# EAGLE board _X4 (EAGLE 6.6.0)
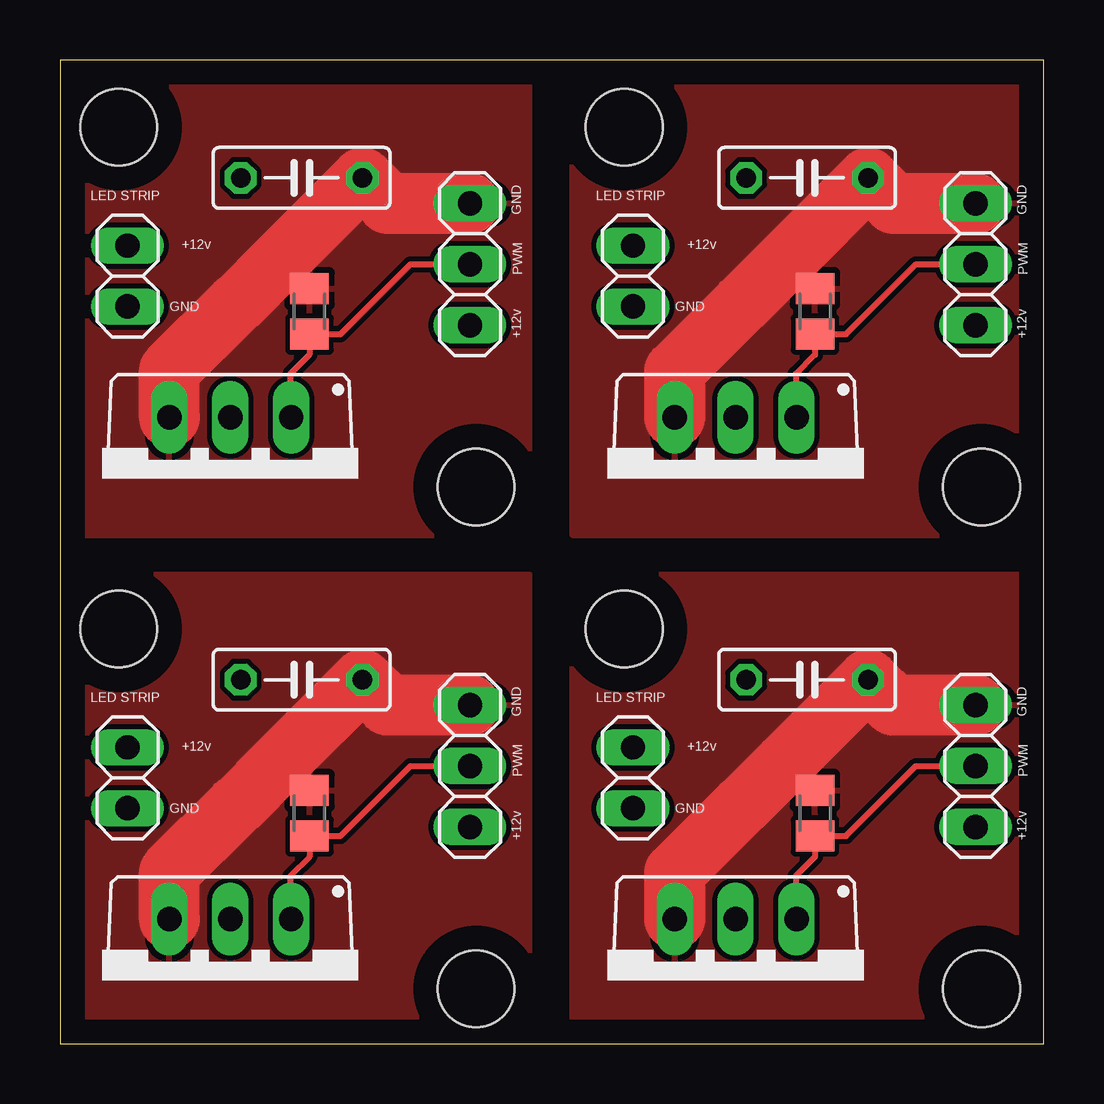
[diagram p0: board, top side]
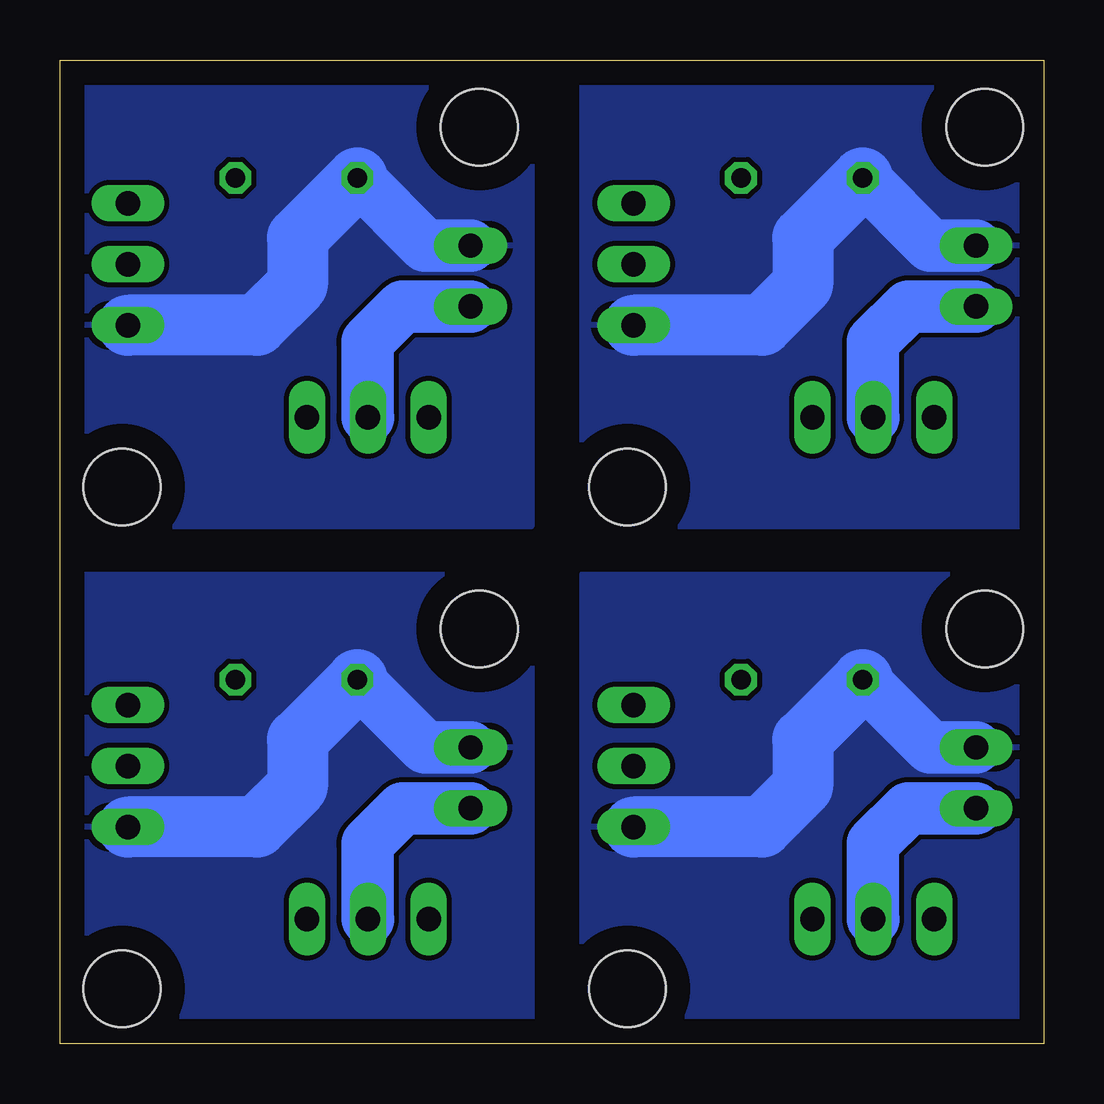
[diagram p1: board, bottom side, seen from below]

Size 41 x 41 mm. Coordinates in mm from the lower left corner, seen from the top.
Outline: 0,0 41,0 41,41 0,41 0,0
Copper layers (1*16): Top 0.035mm / dielectric 1.5mm / Bottom 0.035mm
Design rules "default": minimum track width 10mil, minimum drill 24mil, track to track 8mil, track to pad 8mil, pad to pad 8mil, via to via 8mil, smd to smd 8mil, copper to edge 40mil, drill to drill 8mil, minimum pad ring 10mil, minimum via ring 8mil, stop-mask expansion 4mil, vias tented up to drill 0mil, thermal gap 10mil
Holes 3.2 mm at 2.45,17.28 17.35,2.28 2.45,38.2 17.35,23.2 23.52,17.28 38.42,2.28 23.52,38.2 38.42,23.2

## Footprints (pad centres in the part's own frame; a part is rotated, then mirrored left to right if it is on the bottom)
C050-025X075 = drill 0.813 octagon: 1 -2.54,0; 2 2.54,0
1X03 = drill 1.016 long: 1 -2.54,0; 2 0,0; 3 2.54,0
1X02 = drill 1.016 long: 1 -1.27,0; 2 1.27,0
TO220BV = drill 1.016 long: D 0,-2.54; G -2.54,-2.54; S 2.54,-2.54
M0805 = smd 1.3 x 1.6: 1 -0.95,0; 2 0.95,0

## Placement (x,y rotation side)
C1  [C050-025X075]  10.07,15.17 0 top
C2  [C050-025X075]  10.07,36.08 0 top
C3  [C050-025X075]  31.14,15.17 0 top
C4  [C050-025X075]  31.14,36.08 0 top
JP1  [1X03]  17.09,11.57 90 top
JP2  [1X02]  2.82,11.07 270 top
JP3  [1X03]  17.09,32.49 90 top
JP4  [1X02]  2.82,31.99 270 top
JP5  [1X03]  38.16,11.57 90 top
JP6  [1X02]  23.89,11.07 270 top
JP7  [1X03]  38.16,32.49 90 top
JP8  [1X02]  23.89,31.99 270 top
Q1  [TO220BV]  7.1,2.64 180 top
Q2  [TO220BV]  7.1,23.56 180 top
Q3  [TO220BV]  28.17,2.64 180 top
Q4  [TO220BV]  28.17,23.56 180 top
R1  [M0805]  10.4,9.6 270 top
R2  [M0805]  10.4,30.52 270 top
R3  [M0805]  31.47,9.6 270 top
R4  [M0805]  31.47,30.52 270 top

## Library data of the parts
C1-C4 = rcl
JP1-JP8 = pinhead
Q1-Q4 = transistor-power
R1-R4 = resistor

## Nets
+15V: C1.1 JP1.1 JP2.1
+15V1: C2.1 JP3.1 JP4.1
+15V2: C3.1 JP5.1 JP6.1
+15V3: C4.1 JP7.1 JP8.1
GND: C1.2 JP1.3 Q1.S R1.1
GND1: C2.2 JP3.3 Q2.S R2.1
GND2: C3.2 JP5.3 Q3.S R3.1
GND3: C4.2 JP7.3 Q4.S R4.1
LED_STRIP_GND: JP2.2 Q1.D
LED_STRIP_GND1: JP4.2 Q2.D
LED_STRIP_GND2: JP6.2 Q3.D
LED_STRIP_GND3: JP8.2 Q4.D
SIGNAL: JP1.2 Q1.G R1.2
SIGNAL1: JP3.2 Q2.G R2.2
SIGNAL2: JP5.2 Q3.G R3.2
SIGNAL3: JP7.2 Q4.G R4.2

## Tracks (layer width: path | path; a pad name or v marks a point on that pad's centre or on a via)
+15V
  Bottom 2.184: JP2.1 4.71,12.35 C1.1
  Bottom 2.54: C1.1 10.03,12.67 10.03,10.72 11.73,9.03 JP1.1
  pour Bottom: 0.28,19.56 0.28,0.64 19.23,0.64 19.23,19.56
+15V1
  Bottom 2.184: JP4.1 4.71,33.26 C2.1
  Bottom 2.54: C2.1 10.03,33.58 10.03,31.64 11.73,29.95 JP3.1
  pour Bottom: 0.28,40.48 0.28,21.56 19.23,21.56 19.23,40.48
+15V2
  Bottom 2.184: JP6.1 25.78,12.35 C3.1
  Bottom 2.54: C3.1 31.1,12.67 31.1,10.72 32.8,9.03 JP5.1
  pour Bottom: 21.35,19.56 21.35,0.64 40.3,0.64 40.3,19.56
+15V3
  Bottom 2.184: JP8.1 25.78,33.26 C4.1
  Bottom 2.54: C4.1 31.1,33.58 31.1,31.64 32.8,29.95 JP7.1
  pour Bottom: 21.35,40.48 21.35,21.56 40.3,21.56 40.3,40.48
GND
  Top 0.254: R1.1 10.28,10.55 9.14,11.69
  Top 2.54: JP1.3 13.67,14.11 C1.2 9.14,11.69 7.36,9.91 7.34,9.91 4.56,7.13 Q1.S
  pour Top: 0.28,19.54 0.28,0.28 19.58,0.28 19.58,19.54
GND1
  Top 0.254: R2.1 10.28,31.47 9.14,32.61
  Top 2.54: JP3.3 13.67,35.02 C2.2 9.14,32.61 7.36,30.83 7.34,30.83 4.56,28.04 Q2.S
  pour Top: 0.28,40.45 0.28,21.2 19.58,21.2 19.58,40.45
GND2
  Top 0.254: R3.1 31.35,10.55 30.21,11.69
  Top 2.54: JP5.3 34.74,14.11 C3.2 30.21,11.69 28.43,9.91 28.41,9.91 25.63,7.13 Q3.S
  pour Top: 21.35,19.54 21.35,0.28 40.65,0.28 40.65,19.54
GND3
  Top 0.254: R4.1 31.35,31.47 30.21,32.61
  Top 2.54: JP7.3 34.74,35.02 C4.2 30.21,32.61 28.43,30.83 28.41,30.83 25.63,28.04 Q4.S
  pour Top: 21.35,40.45 21.35,21.2 40.65,21.2 40.65,40.45
LED_STRIP_GND
  Bottom 2.184: JP2.2 5.64,9.8 7.11,8.34 7.11,5.2 Q1.D
LED_STRIP_GND1
  Bottom 2.184: JP4.2 5.64,30.72 7.11,29.25 7.11,26.11 Q2.D
LED_STRIP_GND2
  Bottom 2.184: JP6.2 26.71,9.8 28.18,8.34 28.18,5.2 Q3.D
LED_STRIP_GND3
  Bottom 2.184: JP8.2 26.71,30.72 28.18,29.25 28.18,26.11 Q4.D
SIGNAL
  Top 0.254: Q1.G 9.6,5.22 9.6,6.99 10.4,7.79 R1.2 11.7,8.65 14.61,11.57 JP1.2
SIGNAL1
  Top 0.254: Q2.G 9.6,26.13 9.6,27.91 10.4,28.71 R2.2 11.7,29.57 14.61,32.48 JP3.2
SIGNAL2
  Top 0.254: Q3.G 30.67,5.22 30.67,6.99 31.47,7.79 R3.2 32.77,8.65 35.68,11.57 JP5.2
SIGNAL3
  Top 0.254: Q4.G 30.67,26.13 30.67,27.91 31.47,28.71 R4.2 32.77,29.57 35.68,32.48 JP7.2

## Text on the board
tNames: LED STRIP | GND | LED STRIP | GND | +12v | +12v | PWM | PWM | GND | GND | +12v | +12v | LED STRIP | GND | LED STRIP | GND | +12v | +12v | PWM | PWM | GND | GND | +12v | +12v